# Altium PCB TMC2210 V10C.PcbDoc
Units mil, origin at the board's own origin, x right, y up, seen from the top; angles counter-clockwise.
Board outline 600 x 800 mil, 4 copper layers (Top Layer, Signal Layer 1, Signal Layer 2, Bottom Layer), stack 63.036 mil thick; 24 components, 26 nets, 94 pads, 81 vias.
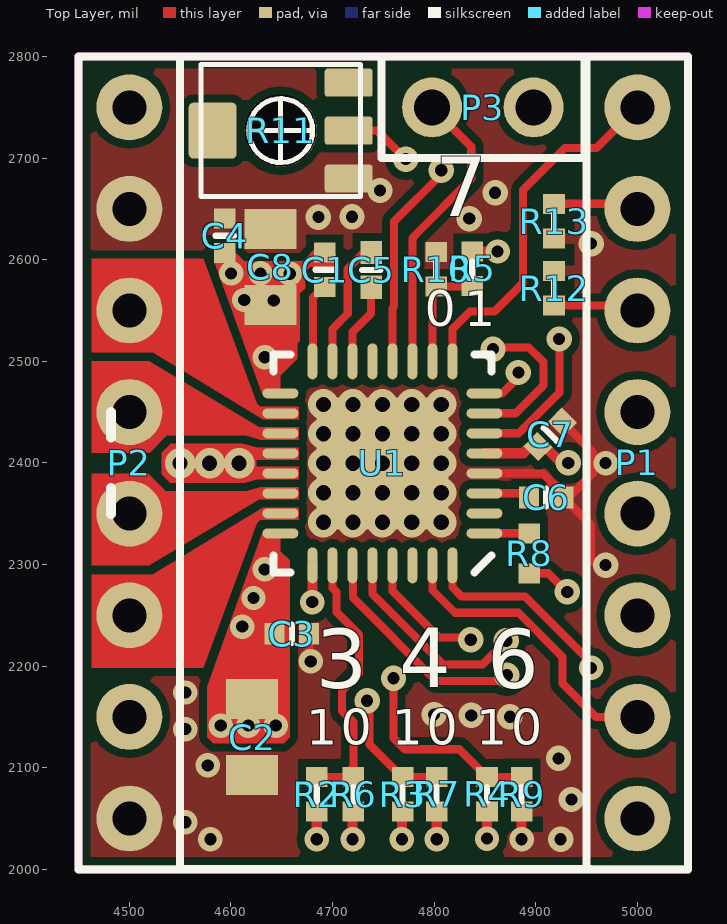
[diagram p0: Top Layer view]
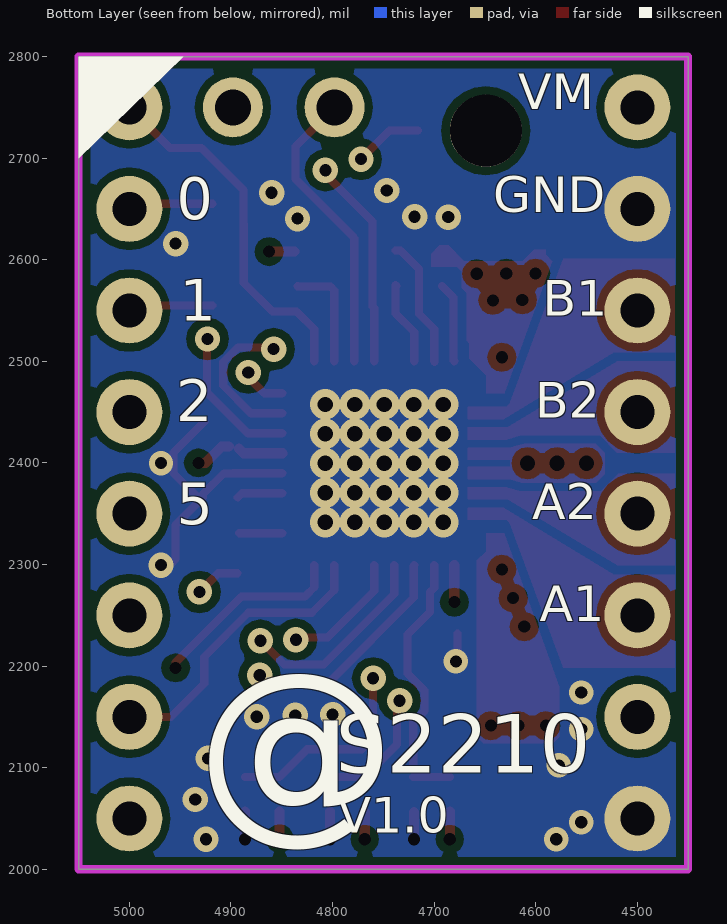
[diagram p1: Bottom Layer view, seen from below]
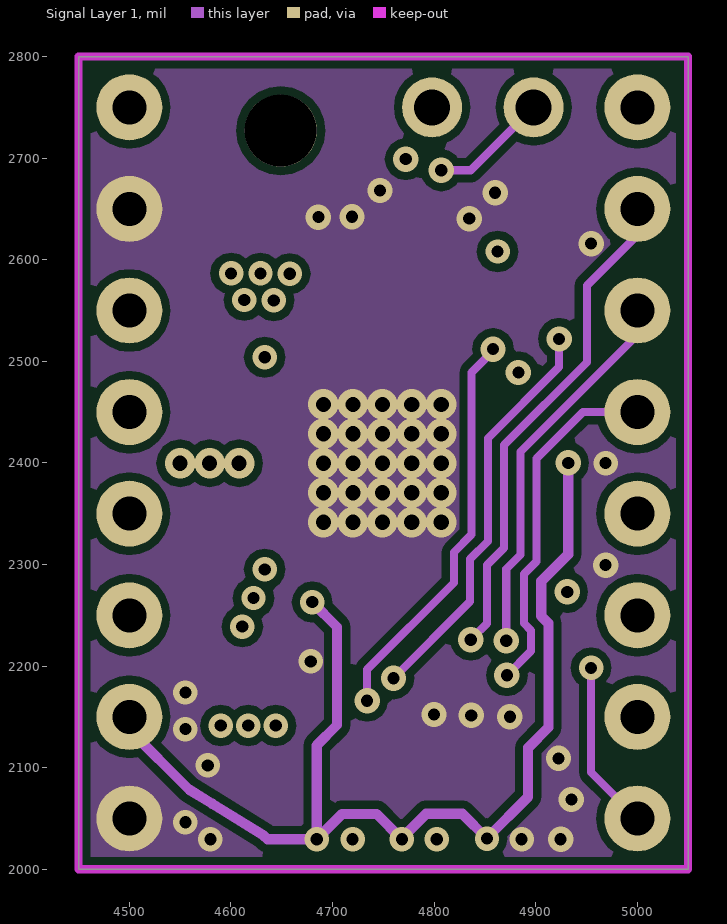
[diagram p2: Signal Layer 1]
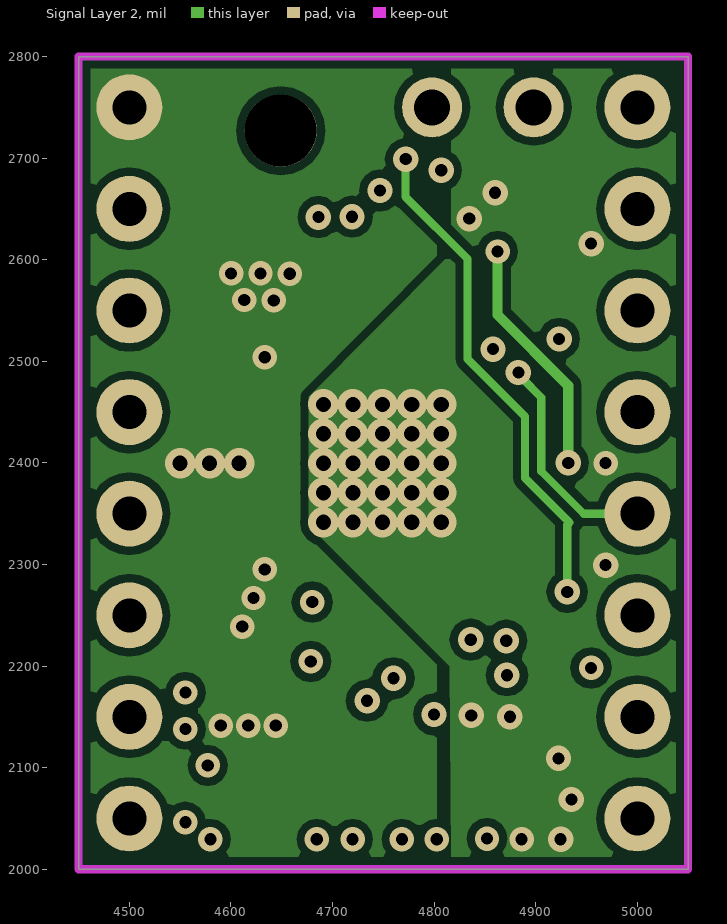
[diagram p3: Signal Layer 2]
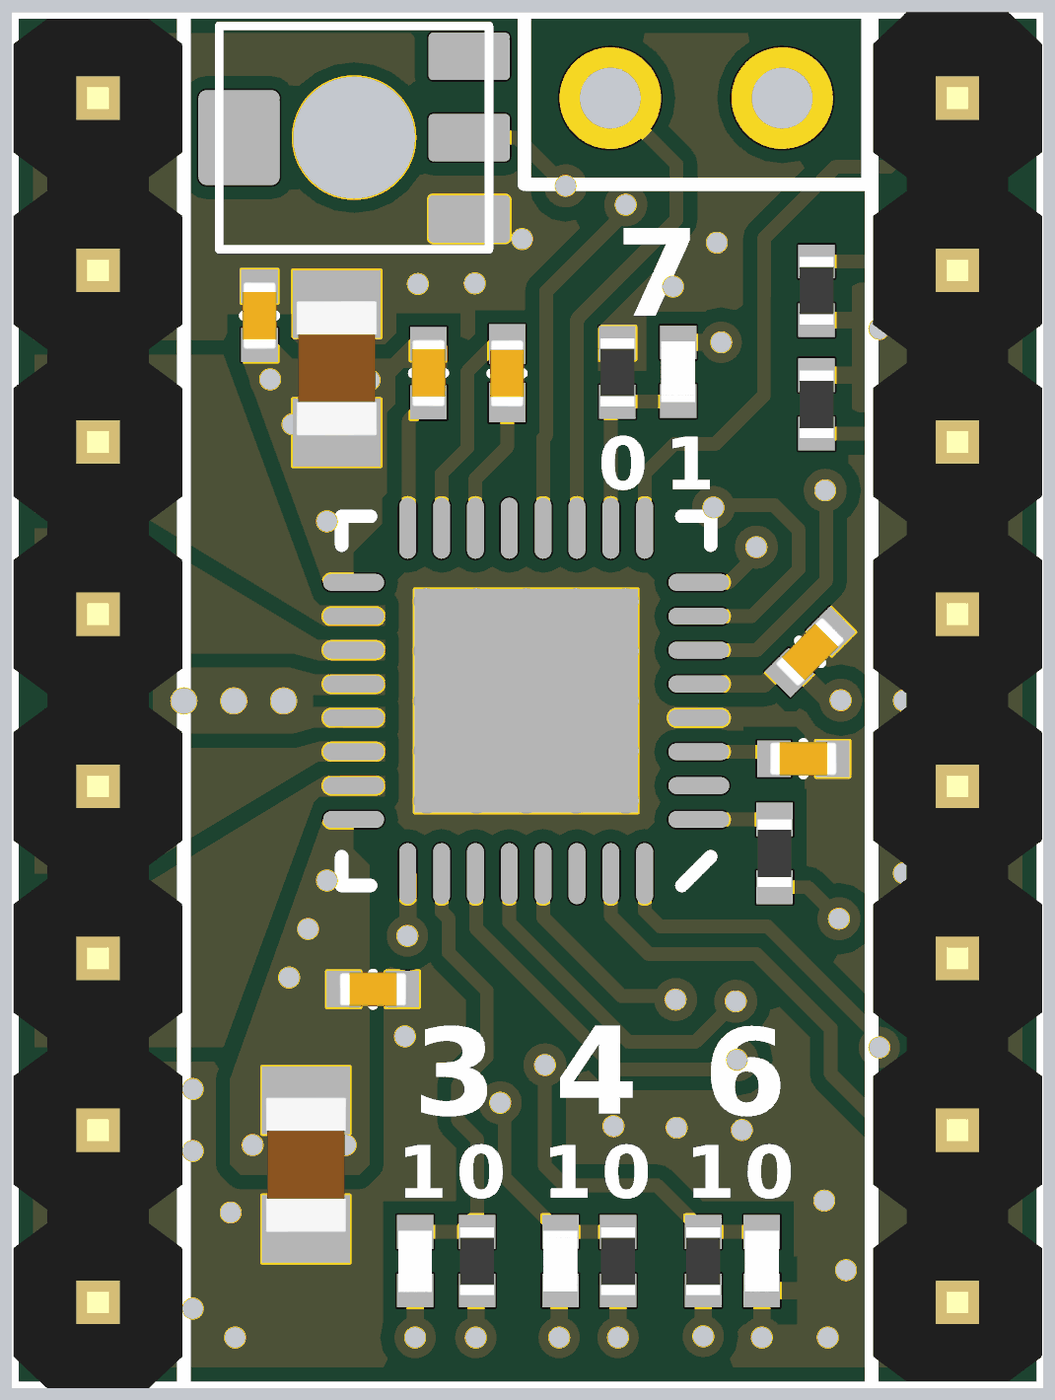
[diagram p4: 3D render of the assembled board from above, using the file's embedded part models]

## Layer stack, top to bottom
Top Solder: solder mask 0.4, Solder Resist, Dk 3.5
Top Layer: signal copper 1.4
Dielectric 1: core 10, FR-4, Dk 4.2
Signal Layer 1: signal copper 1.4173
Dielectric 3: prepreg 37.4016, Dk 4.2
Signal Layer 2: signal copper 1.4173
Dielectric 2: core 10, Dk 4.2
Bottom Layer: signal copper 1.4
Bottom Solder: solder mask 0.4, Solder Resist, Dk 3.5

## Board outline
4450,2000 4450,2800 5050,2800 5050,2000

## Design rules (kind name [scope] priority, off if disabled: settings)
Clearance [All] p1: gap=8 ignorepadtopadclearanceinfootprint=FALSE except(0: Arc-Hole Track-Hole SMDPad-Hole THPad-Hole Via-Hole Fill-Hole Poly-Hole Region-Hole Text-Hole)
PolygonConnect [All] p1: connectstyle=Direct reliefconductorwidth=10 reliefentries=4 polygonreliefangle="90 Angle" airgapwidth=10
RoutingVias [All] p1: holewidth=12 width=24 viastyle="Through Hole" minholewidth=10 minwidth=20 maxholewidth=20 maxwidth=50
SolderMaskExpansion [All] p1: expansion=4 istentingtop=FALSE
Width [All] p1: maxlimit=50 minlimit=6 preferedwidth=8
30 further rules are at their usual default settings.

## Components (designator, comment, footprint, x,y, rotation, side; value= is the part's Value field where it differs from the comment)
C1 "1uF" CAP0402_NS#1 4692.31,2590.16 r90 top
C2 "4.7uF/50V" CAP0805 4621,2130 r90 top
C3 "100nF" CAP0402_NS#1 4660,2232 r180 top
C4 "100nF" CAP0402_NS#1 4594,2623.57 r270 top
C5 "22nF" CAP0402_NS#2 4738,2590 r90 top
C6 "4.7uF/6.3V" CAP0402_NS#1 4910.3,2366 r0 top
C7 "100nF" CAP0402_NS#1 4914.23,2428.13 r45 top
C8 "4.7uF/50V" CAP0805 4638.85,2592.94 r270 top
P1 "Header 8" "Header 1X8" 5000,2050 r90 top
P2 "Header 8" "Header 1X8" 4500,2750 r270 top
P3 "Header 2" HDR1X2 4898,2750 r180 top
R2 "NC" RES0402_NS 4684.52,2073.91 r270 top
R3 "NC" RES0402_NS 4769,2073.95 r270 top
R4 "10K" RES0402_NS 4852.1,2073.91 r270 top
R5 "NC" RES0402_NS 4837.54,2590.99 r90 top
R6 "10K" RES0402_NS 4720.52,2073.91 r90 top
R7 "10K" RES0402_NS 4802.53,2073.91 r90 top
R8 "12K" RES0402 4893.55,2311.02 r90 top
R9 "NC" RES0402_NS 4886.16,2073.91 r90 top
R10 "10K" RES0402_NS 4802.1,2590.55 r270 top
R11 "10k" POT_EVM3R 4649,2727.05 r90 top
R12 "10K" RES0402_NS 4918,2572 r270 top
R13 "10K" RES0402_NS 4918,2638 r90 top
U1 "TMC2210ATJ+" QFN32(Atmel) 4749.1,2399.61 r180 top

## Footprints (in the part's own frame and the unit in brackets; to place one, negate y for a bottom-side part, rotate by r counter-clockwise, add the part's x,y. Pads: shape width x height; smd on the part's side, far side on the other; paste and mask are expansions set on the pad)
CAP0402_NS#1 [mm]
  rect 0.5x0.54 smd mask+0.025: 1(-0.433,0) 2(0.433,0)
  silkscreen extent 0,-0.23 0,0.23, body extent -0.5,-0.25 0.5,0.25, height 0.5
CAP0402_NS#2 [mm]
  rect 0.584x0.54 smd mask+0.025: 1(-0.433,0) 2(0.433,0)
  silkscreen extent 0,-0.23 0,0.23, body extent -0.5,-0.25 0.5,0.25, height 0.5
CAP0805 [mm]
  rect 1x1.3 smd mask+0.025: 1(-0.95,0) 2(0.95,0)
  body extent -1,-0.6 1,0.6, height 1.2
HDR1X2 [mm] "Connector; Header; 2 Position"
  round 1.5 hole 0.9 mask+0.025: 1(0,0) 2(2.54,0)
  silkscreen extent -1.27,-1.27 3.81,1.27
"Header 1X8" [mm]
  round 1.65 hole 0.85 mask+0.025: 1(0,0) 2(2.54,0) 3(5.08,0) 4(7.62,0) 5(10.16,0) 6(12.7,0) 7(15.24,0) 8(17.78,0)
  silkscreen extent -1.27,-1.27 19.05,1.27, body extent -1.17,-1.25 19.05,1.25, height 8.2
POT_EVM3R [mil] "POT_EVM3R"
  rrect20% 27.56x47.24 smd mask+1: 1(-47.24,-66.93) 2(0,-66.93) 3(47.24,-66.93)
  round 70.87 hole 70.87 mask+1: 1(0,0)
  rrect20% 55.12x47.24 smd mask+1: MOUNT(0,66.93)
  silkscreen extent -65,-78 65,78
QFN32(Atmel) [mm]
  oval 0.9x0.25 smd mask+0.025: 1(-2.55,1.75) 2(-2.55,1.25) 3(-2.55,0.75) 4(-2.55,0.25) 5(-2.55,-0.25) 6(-2.55,-0.75) 7(-2.55,-1.25) 8(-2.55,-1.75) 17(2.55,-1.75) 18(2.55,-1.25) 19(2.55,-0.75) 20(2.55,-0.25) 21(2.55,0.25) 22(2.55,0.75) 23(2.55,1.25) 24(2.55,1.75)
  oval 0.25x0.9 smd mask+0.025: 9(-1.75,-2.55) 10(-1.25,-2.55) 11(-0.75,-2.55) 12(-0.25,-2.55) 13(0.25,-2.55) 14(0.75,-2.55) 15(1.25,-2.55) 16(1.75,-2.55) 25(1.75,2.55) 26(1.25,2.55) 27(0.75,2.55) 28(0.25,2.55) 29(-0.25,2.55) 30(-0.75,2.55) 31(-1.25,2.55) 32(-1.75,2.55)
  rect 3.3x3.3 smd mask+0.025: 33(0,0)
  silkscreen extent -2.73,-2.73 2.73,2.73, body extent -2.55,-2.58 2.6,2.58, height 1
RES0402 [mm]
  rect 0.5x0.54 smd mask+0.025: 1(-0.5,0) 2(0.5,0)
  body extent -0.5,-0.25 0.5,0.25, height 0.5
RES0402_NS [mm]
  rect 0.5x0.54 smd mask+0.025: 1(-0.433,0) 2(0.433,0)
  silkscreen extent -0.18,0 0.18,0, body extent -0.5,-0.25 0.5,0.25, height 0.5

## Part data
C1 C2 C3 C4 C5 C6 C7 C8: library part Capacitor
P1 P2: "Header, 8-Pin", LatestRevisionDate=17-Jul-2002, LatestRevisionNote="Re-released for DXP Platform.", Publisher="Altium Limited"
P3: "Header, 2-Pin", LatestRevisionDate=17-Jul-2002, LatestRevisionNote="Re-released for DXP Platform.", Publisher="Altium Limited"
R2 R3 R4 R5 R6 R7 R8 R9 R10 R12 R13: library part Resistor
R11: library part POTEVM3R, "Potentiometer"

## Via types
v1: diameter 30, hole 15, Top Layer to Bottom Layer, tented both sides, 25 vias
v2: diameter 25, hole 12, Top Layer to Bottom Layer, tented both sides, 24 vias
v3: diameter 24/24/24/0 (per signal layer), hole 12, Top Layer to Bottom Layer, tented both sides, 21 vias
v4: diameter 24, hole 12, Top Layer to Bottom Layer, tented both sides, 7 vias
v5: diameter 30/30/30/0 (per signal layer), hole 15, Top Layer to Bottom Layer, tented both sides, 3 vias
v6: diameter 25/25/25/0 (per signal layer), hole 12, Top Layer to Bottom Layer, tented both sides, 1 vias

## Nets (pads, with @x,y where several pads share a name; then routed paths per layer and width w, separated by ;. In a path a pad name is that pad's centre, name@x,y a point inside that pad or via, vN(x,y) a via of type N, cw(c..) or ccw(c..) an arc to the next point about the centre after c; other vN are vias at no path point)
1V8: C6.1 U1.3 | length 45.4
  Top Layer w8: U1.3 4889.16,2370.08 C6.1
CFG0: P1.7 R13.2 U1.29 | length 681
  Top Layer w8: U1.29 4758.94,2273.8 4804.75,2228 v2@4838,2228 ; R13.2 4984.95,2655.05 P1.7@4986,2654
  Signal Layer 1 w8: v2@4838,2228 4852.06,2242.06 4852.06,2299.41 4868.89,2316.25 4868.89,2417.61 4950.31,2499.03 4950.31,2574.58 5000,2624.27 P1.7
  other v2: 4836,2226
CFG1: P1.6 R12.2 U1.28 | length 651.6
  Top Layer w8: U1.28 4739.26,2270.86 4808.62,2201.5 4847.5,2201.5 4870,2224 v2@4871,2224 ; R12.2 4991.95,2554.95 P1.6@4992,2555
  Signal Layer 1 w8: v2@4871,2224 v2(4871,2225) 4871,2295.73 4884.89,2309.62 4884.89,2410.99 5000,2526.1 P1.6
CFG2: P1.5 U1.27 | length 569.1
  Top Layer w8: U1.27 4720,2298.79 4720,2267.49 4801.99,2185.5 4866.15,2185.5 v2(4871.65,2191)
  Signal Layer 1 w8: v2(4871.65,2191) 4895.5,2214.85 4895.5,2235.15 4888.5,2242.15 4888.5,2290.6 4900.89,2302.99 4900.89,2404.36 4946.53,2450 P1.5
CFG3: R2.1 R6.2 U1.26 | length 270.7
  Top Layer w8: R2.1 R6.2@4710.67,2090.96 ; U1.26 4699.89,2277.05 4704,2272.94 4704,2253.27 4726.21,2231.05 4726.21,2192.86 4709.5,2176.15 4709.5,2155.85 4720.52,2144.83 4720.52,2100.81 R6.2@4710.67,2090.96 ; R6.2 R6.2@4710.67,2090.96
CFG4: R3.1 R7.2 U1.7 | length 668.1
  Top Layer w8: v2(4734,2166) 4736.52,2163.48 4736.52,2122.72 4768.28,2090.96 R7.2 ; U1.7 4880.29,2448.82 4907.5,2476.03 4907.5,2499.15 4893.15,2513.5 4861.5,2513.5 v2@4860,2512
  Signal Layer 1 w8: v2(4734,2166) 4734,2196.65 4819.42,2282.07 4819.42,2312.03 4836.89,2329.5 4836.89,2488.89 v2@4860,2512
  other v2: 4858,2512
CFG5: P1.4 U1.8 | length 258.8
  Top Layer w8: U1.8 4866.78,2468.5 4883,2484.72 v2@4883,2487
  Signal Layer 2 w8: v2@4883,2487 4886.9,2483.1 4905.49,2464.51 4905.49,2391.82 4947.31,2350 P1.4
  other v2: 4883,2489
CFG6: R4.1 R9.2 U1.6 | length 750.7
  Top Layer w8: v2@4755,2188 v2(4760,2188) 4760,2129.35 4771.24,2118.12 4824.95,2118.12 R4.1 R9.2 ; U1.6 4883.23,2429.13 4923.5,2469.41 4923.5,2521.5 v2(4923,2522)
  Signal Layer 1 w8: v2(4760,2188) 4835.42,2263.46 4835.42,2305.41 4852.89,2322.88 4852.89,2424.24 4923,2494.35 v2(4923,2522)
CFG7: R5.1 R10.2 U1.10 | length 107.7
  Top Layer w8: U1.10 4798.31,2569.71 R10.2 4834.1,2573.5 R5.1@4834.54,2573.94
DIR: P1.1 U1.32 | length 361.2
  Top Layer w8: U1.32 4818,2277.58 4827.08,2268.5 4889.53,2268.5 4954.49,2203.54 v3(4954.49,2198.21)
  Signal Layer 1 w8: v3(4954.49,2198.21) 4954.49,2095.51 P1.1
EN: P1.8 U1.9 | length 363.9
  Top Layer w8: U1.9 4818,2531.73 4835.27,2549 4859.25,2549 4887.35,2577.1 4887.35,2635.35 4887.5,2635.5 4887.5,2668.5 4929,2710 4960,2710 P1.8
  Signal Layer 1 w8: P1.8@5000,2743.69 P1.8
ERROR: P3.2 U1.11 | length 289.9
  Top Layer w8: U1.11 4778.63,2620.98 4779.47,2621.82 4779.47,2622.41 4836.5,2679.44 4836.5,2711.5 P3.2
GND: C2.1 C3.1 C4.1 C6.2 C7.2 C8.1 P2.2 P2.8 R6.1 R7.1 R9.1 R10.1 R11.1@4715.93,2679.81 R12.1 R13.1 U1.4 U1.33 | length 377.2
  Top Layer w8: v4@4676.57,2206.63 4677.06,2207.12 C3.1 ; U1.4 4897.59,2389.76 4897.76,2389.6 4907.09,2389.6 4927.33,2369.35 C6.2@4927.33,2366.79 ; C7.2 4926.47,2440.18 4956.5,2410.15 4956.5,2389.85 4933.44,2366.79 C6.2@4927.33,2366.79 ; v2@4959.5,2300.15 4954.49,2305.16 4954.49,2338.84 C6.2 C6.2@4927.33,2366.79
  Top Layer w10: v3(4719.8,2029.55) R6.1@4719.8,2056.15 ; v3(4802.53,2029.59) R7.1 ; v3(4886.16,2029.59) R9.1
  other v1: 4691.1,2341.61 4720.1,2341.61 4749.1,2341.61 4778.1,2341.61 4807.1,2341.61 4691.1,2370.61 4720.1,2370.61 4749.1,2370.61 4778.1,2370.61 4807.1,2370.61 4691.1,2399.61 4720.1,2399.61 4749.1,2399.61 4778.1,2399.61 4807.1,2399.61 4691.1,2428.61 4720.1,2428.61 4749.1,2428.61 4778.1,2428.61 4807.1,2428.61 4691.1,2457.61 4720.1,2457.61 4749.1,2457.61 4778.1,2457.61 4807.1,2457.61
  other v2: 4924.53,2029.59 4935.11,2068.75 4922.46,2109.17 4874.55,2150.19 4799.89,2152.42 4836.62,2151.54 4968.76,2299.41 4954.49,2615.84 4834.5,2640.43 4686.09,2641.97 4719.22,2642.31 4860,2666 4746.71,2668.1
  other v4: 4579.78,2029.59 4555.17,2046.36 4577.18,2102.23 4555.17,2138 4555.17,2174.01 4678.57,2204.63 4968.76,2399.76
INDEX: P3.1 U1.12 | length 324.6
  Top Layer w8: U1.12 4758.94,2552.17 4760.63,2553.85 4760.63,2637.63 4807,2684 v2(4807,2688)
  Signal Layer 1 w8: v2(4807,2688) 4836,2688 P3.1
NetC1_1: C1.1 U1.16 | length 79.1
  Top Layer w8: U1.16 4680.85,2500.65 4680.85,2562.64 C1.1@4692.31,2574.1
NetC5_1: C5.1 U1.14 | length 82
  Top Layer w8: U1.14 4719.57,2528.79 4738,2547.21 C5.1 ; C5.1@4737,2573.94 C5.1@4738,2574.94
NetC5_2: C5.2 U1.15 | length 131.8
  Top Layer w8: U1.15@4699.68,2499.16 U1.15@4699.68,2503.21 ; U1.15 4699.89,2531.73 4714.94,2546.79 4714.94,2590.99 4732.99,2609.04 C5.2@4738,2609.04
NetR8_1: R8.1 R11.2 | length 596.5
  Top Layer w8: R11.2 4743.95,2727.05 v2(4772,2699) ; R8.1 4912.66,2291.34 v2(4931,2273)
  Signal Layer 2 w8: v2(4772,2699) 4772,2661.91 4833,2600.91 4833,2502.29 4889.49,2445.8 4889.49,2385.2 4933.33,2341.36 4931,2339.03 v2@4931,2283
NetR8_2: R8.2 U1.1 | length 42.5
  Top Layer w8: U1.1 4891.55,2330.71 R8.2@4891.84,2331
OUTA1: P2.6 U1.23
OUTA2: P2.5 U1.22
OUTB1: P2.3 U1.18
OUTB2: P2.4 U1.19
STEP: P1.2 U1.31 | length 293.2
  Top Layer w8: U1.31 4798.31,2274.64 4820.45,2252.5 4882.9,2252.5 4926.28,2209.12 4926.28,2182.91 4959.19,2150 P1.2
VCC_IO: C7.1 P2.7 R2.2 R3.2 R4.2 R5.2 U1.5 U1.25 | length 1561.4
  Top Layer w10: v3@4680.2,2268.2 U1.25 ; v3(4684.52,2029.59) R2.2 ; v3(4768.28,2029.59) 4768.28,2056.19 R3.2 ; R5.2 v3(4862.51,2608.03) v3@4863,2608.03 ; U1.5 4849.57,2409.53 4887.68,2409.53 C7.1@4892.09,2413.94 ; v3(4852.1,2030.27) R4.2 ; C7.1 4909.02,2416.07 4925.09,2400 v6(4932,2400)
  Signal Layer 1 w10: P2.7 4500,2137.37 4558.76,2078.61 4581.63,2064.51 4632.41,2033.19 4636.02,2029.59 v3(4684.52,2029.59) ; v3(4680,2263) 4704.5,2238.5 4704.5,2142 4684.52,2122.02 v3(4684.52,2029.59) ; v6(4932,2400) 4932,2310.06 4905.5,2283.56 4905.5,2249.19 4912.5,2242.19 4912.5,2139.56 4892.55,2119.61 4892.55,2071.33 4852.1,2030.89 v3(4852.1,2030.27) 4827.73,2054.63 4792.22,2054.63 4768.28,2030.69 v3(4768.28,2029.59) 4743.32,2054.55 4709.44,2054.55 v3(4684.52,2029.59)
  Signal Layer 2 w10: v3(4862.51,2608.03) 4862.51,2545.56 4932,2476.06 v6(4932,2400)
VM: C1.2 C2.2 C3.2 C4.2 C8.2 P2.1 U1.17 U1.20 U1.21 U1.24 | length 121.4
  Top Layer w8: U1.21 4597.83,2389.76 4597.83,2409.45 U1.20
  other v3: 4590,2141.45 4617.05,2141.45 4644.1,2141.45 4611.19,2238.86 4622.21,2267.03 4633.23,2295.21 4633.23,2504 4613.19,2560.36 4642.1,2559.92 4658,2586.1 4600.17,2586.53 4629.09,2586.53
  other v5: 4550,2399.61 4579,2399.61 4608,2399.61
pads on no net: P1.3 R11.1@4649,2727.05 R11.3 R11.MOUNT U1.2 U1.13 U1.30

## Polygon pours and split planes (outlines as drawn)
GND on Signal Layer 2 "Signal Layer 2-GND" (solid, pour order 2): 4676.42,2465.31 4816.99,2606.79 4816.99,2799.32 5043.01,2799.32 5043.01,2001.32 4816.99,2001.32 4815.46,2199.75 4676.42,2338.79
VM on Signal Layer 2 "Signal Layer 2-VM" (solid, pour order 10): 4802.42,2586.05 4676.42,2460.05 4676.42,2342.32 4802.1,2216.65 4802.42,2202.79 4802.42,1998.32 4799.42,2001.32 4448.42,2001.32 4448.42,2801.32 4801.42,2801.32 4802.42,2800.32
GND on Signal Layer 1 "Signal Layer 1-GND" (solid, pour order 4): 4452.78,2801 4452.78,2001 5048.78,2001 5048.78,2801
GND on Bottom Layer "NONET_L01_P-001" (solid, pour order 12): 4451,2799.61 4451,1999.61 5043,1999.61 5043,2799.61
GND on Top Layer "NONET_L01_P-001" (solid, remove dead copper, pour order 16): 4455,2799.61 4455,1999.61 5047,1999.61 5047,2799.61

## Keep-outs
Keep-Out Layer:
  the board outline again, w8

## Other copper
Top Layer:
  region net VM: 4583.49,2598.69 4590,2605.2 4590,2609.96 4601.92,2609.96 4613.19,2598.69 4670.5,2598.69 4685.81,2614 4694.92,2614 4703,2605.92 4703,2593 4677.9,2593 4673,2588.1 4673,2572 4668,2567 4668,2520 4665.39,2517.39 4665.39,2502.6 4648.71,2485.92 4648.71,2468.5 4631,2468.21
  region net VM: 4576.71,2130 4582.83,2123.88 4651.88,2123.88 4658,2130 4658,2304 4648.71,2313.29 4648.71,2330.71 4631,2331 4576.71,2179.62
  region net OUTB1: 4629.07,2455.25 4625.53,2458.77 4573,2601 4463,2601 4463,2509 4522.88,2509 4631.23,2443.21 4667,2443.21 4667,2455.21 4629.09,2455.21
  region net OUTA1: 4629.07,2343.96 4625.53,2340.44 4573,2198.21 4463,2198.21 4463,2290 4522.53,2290 4631.23,2356 4667,2356 4667,2344 4629.09,2344
  region net OUTB2: 4463,2500 4463,2410 4520,2410 4537,2427 4614,2427 4628.67,2423 4667,2423 4667,2435 4628.02,2435 4519.69,2500
  region net OUTA2: 4463,2299.21 4463,2389.21 4518.79,2389.21 4535.79,2372.21 4614.64,2372.21 4628.72,2376 4667,2376 4667,2364.21 4628.02,2364.21 4519.69,2299.21
  region net VM: 4625.74,2384 4667,2384 4667,2396 4625,2396 4625,2403 4667,2403 4667,2415 4626.69,2415 4611.74,2419 4541,2419 4532,2410 4532,2389 4540.29,2380.71 4614.08,2380.71

## Silkscreen, mask and mechanical layers (free items; w line width, h text height)
Top Overlay:
  lines w8: 4550,2000 4954,2000 ; 4550,2800 4954,2800
  lines w10: 4482,2350 4482,2375 ; 4482,2425 4482,2450
  text "7" at 4801.1,2623.57 h100
  text "0" at 4790.77,2522.66 h60
  text "1" at 4829.5,2522.66 h60
  text "4" at 4765.56,2159.83 h100
  text "3" at 4683.31,2159 h100
  text "6" at 4852.1,2159 h100
  text "1" at 4673.95,2110.8 h60
  text "0" at 4708.28,2110.8 h60
  text "1" at 4758.43,2110.8 h60
  text "0" at 4792.77,2110.8 h60
  text "1" at 4841.53,2110.8 h60
  text "0" at 4875.87,2110.8 h60
Bottom Overlay:
  region: 5050,2800 5050,2700 4947,2800
  text "VM" at 4617.03,2736.08 h60
  text "GND" at 4641.95,2634.7 h60
  text "0" at 4953.32,2626 h70
  text "B1" at 4593.24,2532.87 h60
  text "1" at 4950.46,2526 h70
  text "B2" at 4600.52,2432.76 h60
  text "2" at 4954,2427 h70
  text "A2" at 4603.26,2332.66 h60
  text "5" at 4953.35,2326 h70
  text "A1" at 4595.98,2232.56 h60
  text "S2210" at 4797,2076 h98.43
  text "V1.0" at 4795,2024 h60
  text "@" at 4934,1996 h300
Bottom Solder:
  region: 4828.14,2247.7 4789.34,2208.9 4715.1,2208.9 4700.39,2223.61 4700.39,2271.45 4657.65,2314.19 4657.65,2554.11 4708.47,2604.94 4807.85,2604.94 4824.38,2588.4 4824.38,2514.62 4856.39,2492.44 4856.39,2476.34 4910.3,2423.24 4910.3,2277.82 4880.17,2247.7
Mechanical 1:
  lines w10: 4300,2050 4500,2050 ; 4300,2150 4500,2150 ; 4300,2250 4500,2250 ; 4300,2350 4500,2350 ; 4300,2450 4500,2450 ; 4300,2550 4500,2550 ; 4300,2650 4500,2650 ; 4300,2750 4500,2750 ; 4798,2750 4798,2950 ; 4898.33,2751 4898.33,2951 ; 5000,2050 5200,2050 ; 5000,2150 5200,2150 ; 5000,2350 5200,2350 ; 5000,2550 5200,2550 ; 5000,2650 5200,2650 ; 5000,2750 5200,2750 ; 5001,2249.67 5201,2249.67 ; 5001,2449.67 5201,2449.67
  text "ERROR" at 4784,2975 h60 r270
  text "INDEX" at 4879,2974 h60 r270
  text "VM" at 4278.95,2737.08 h60
  text "EN" at 5273,2731 h60
  text "GND" at 4278.95,2635.7 h60
  text "CFG0" at 5333.2,2631.28 h60
  text "B1" at 4278.9,2533.87 h60
  text "CFG1" at 5326.29,2531.57 h60
  text "B2" at 4278.9,2433.76 h60
  text "CFG2" at 5333.57,2431.86 h60
  text "A2" at 4278.9,2333.66 h60
  text "CFG5" at 5333.36,2332.14 h60
  text "A1" at 4278.9,2233.56 h60
  text "NC" at 5278.49,2232.43 h60
  text "VIO" at 4278.95,2134.18 h60
  text "STEP" at 5331.82,2132.72 h60
  text "GND" at 4278.95,2034.08 h60
  text "DIR" at 5291.43,2034 h60
Mechanical 15:
  lines w10: 4500,2350 4500,2450 ; 4500,2400 4744,2400